# Altium PCB Motor Driver.PcbDoc
Units mm, origin at the board's own origin, x right, y up, seen from the top; angles counter-clockwise.
Board outline 59 x 58 mm, 2 copper layers (Top Layer, Bottom Layer); 19 components, 13 nets, 50 pads, 0 vias.
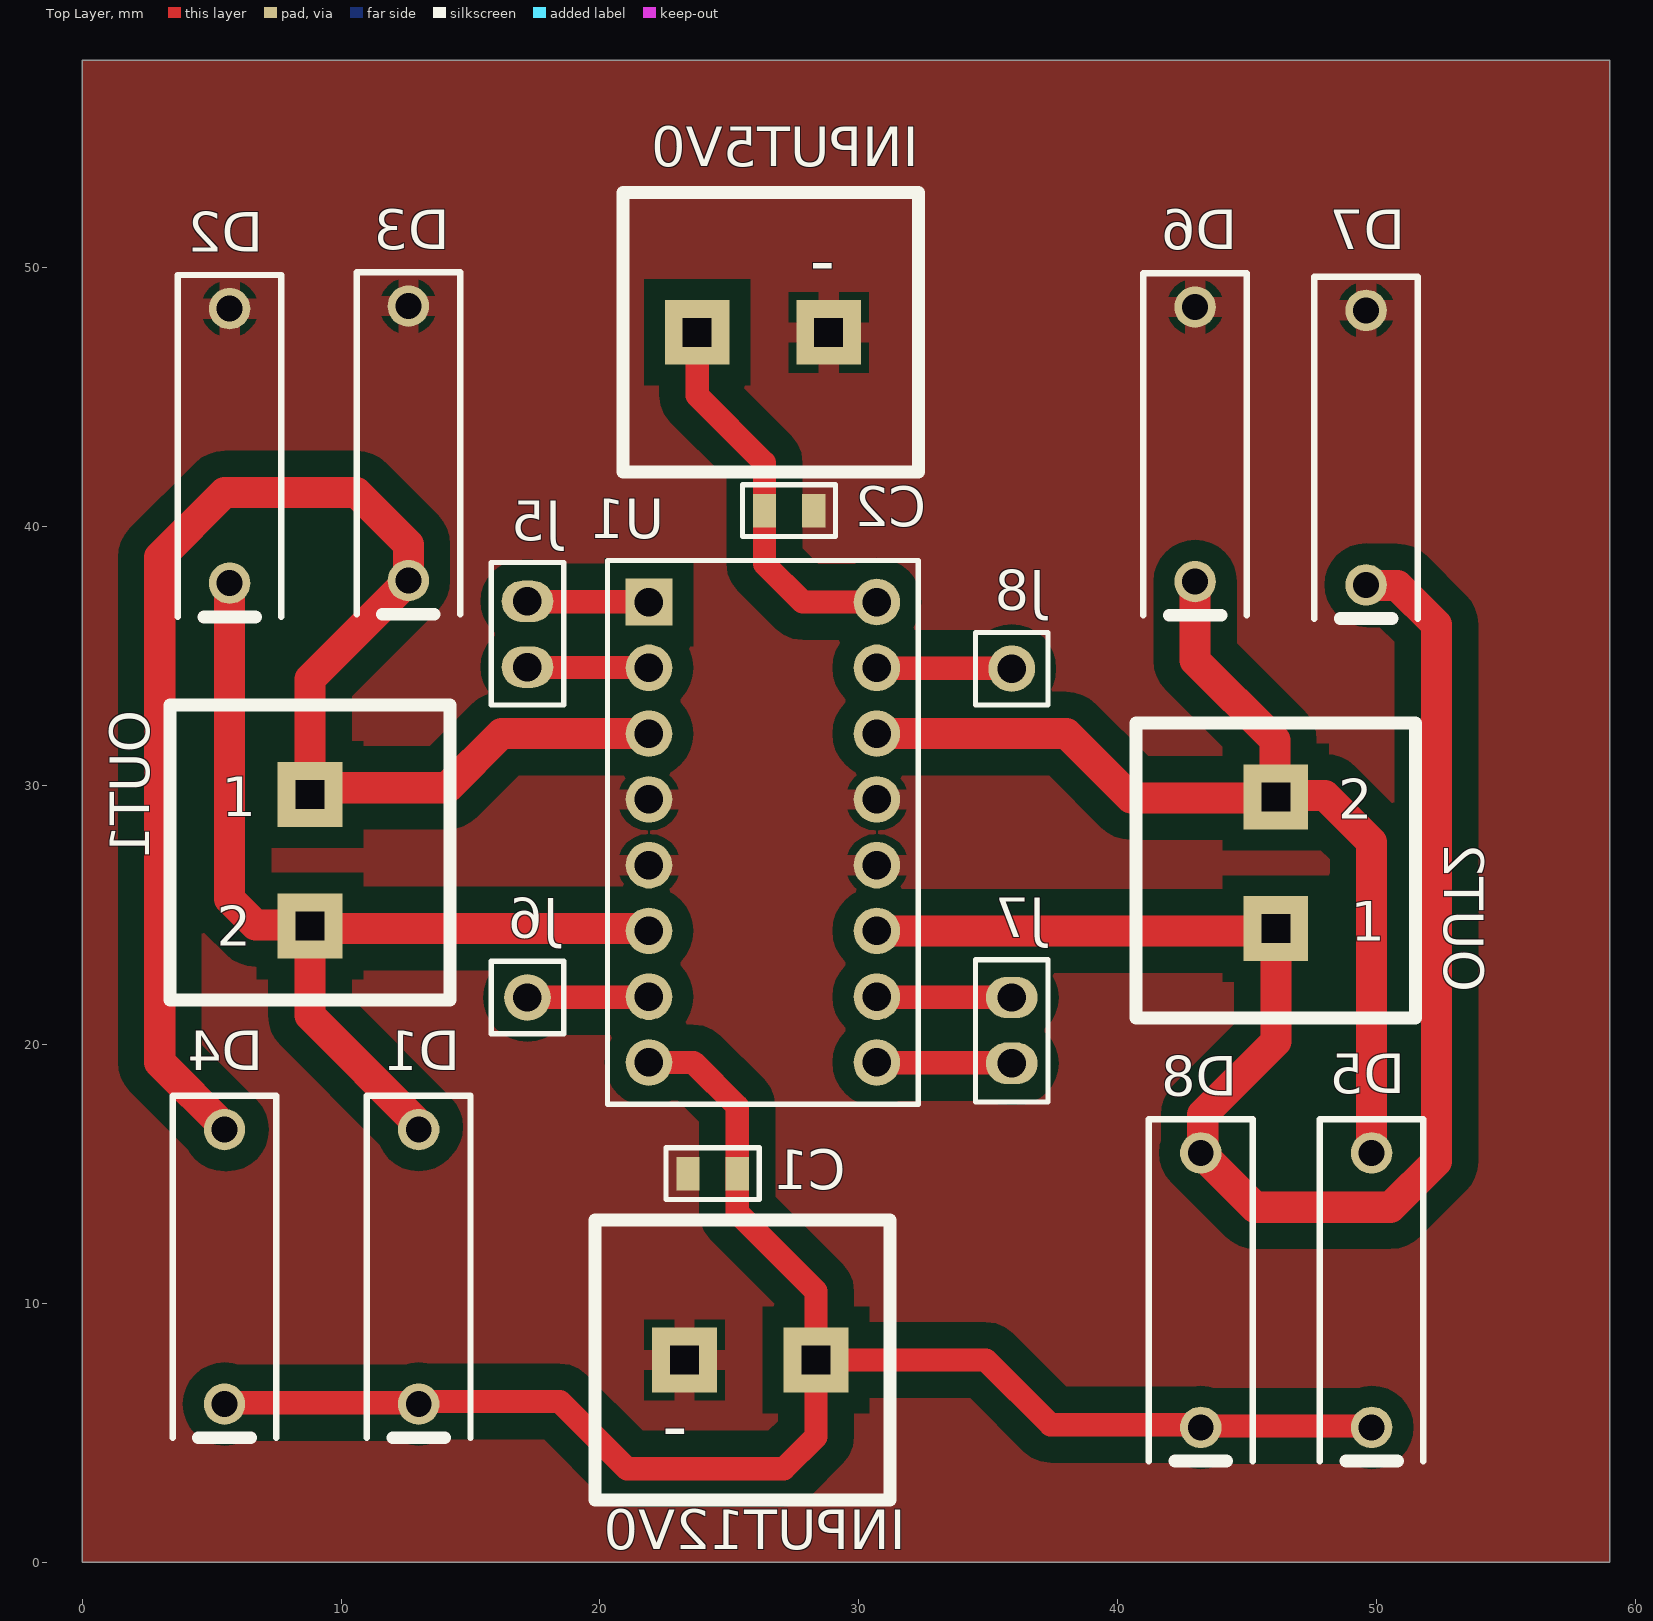
[diagram p0: Top Layer view]
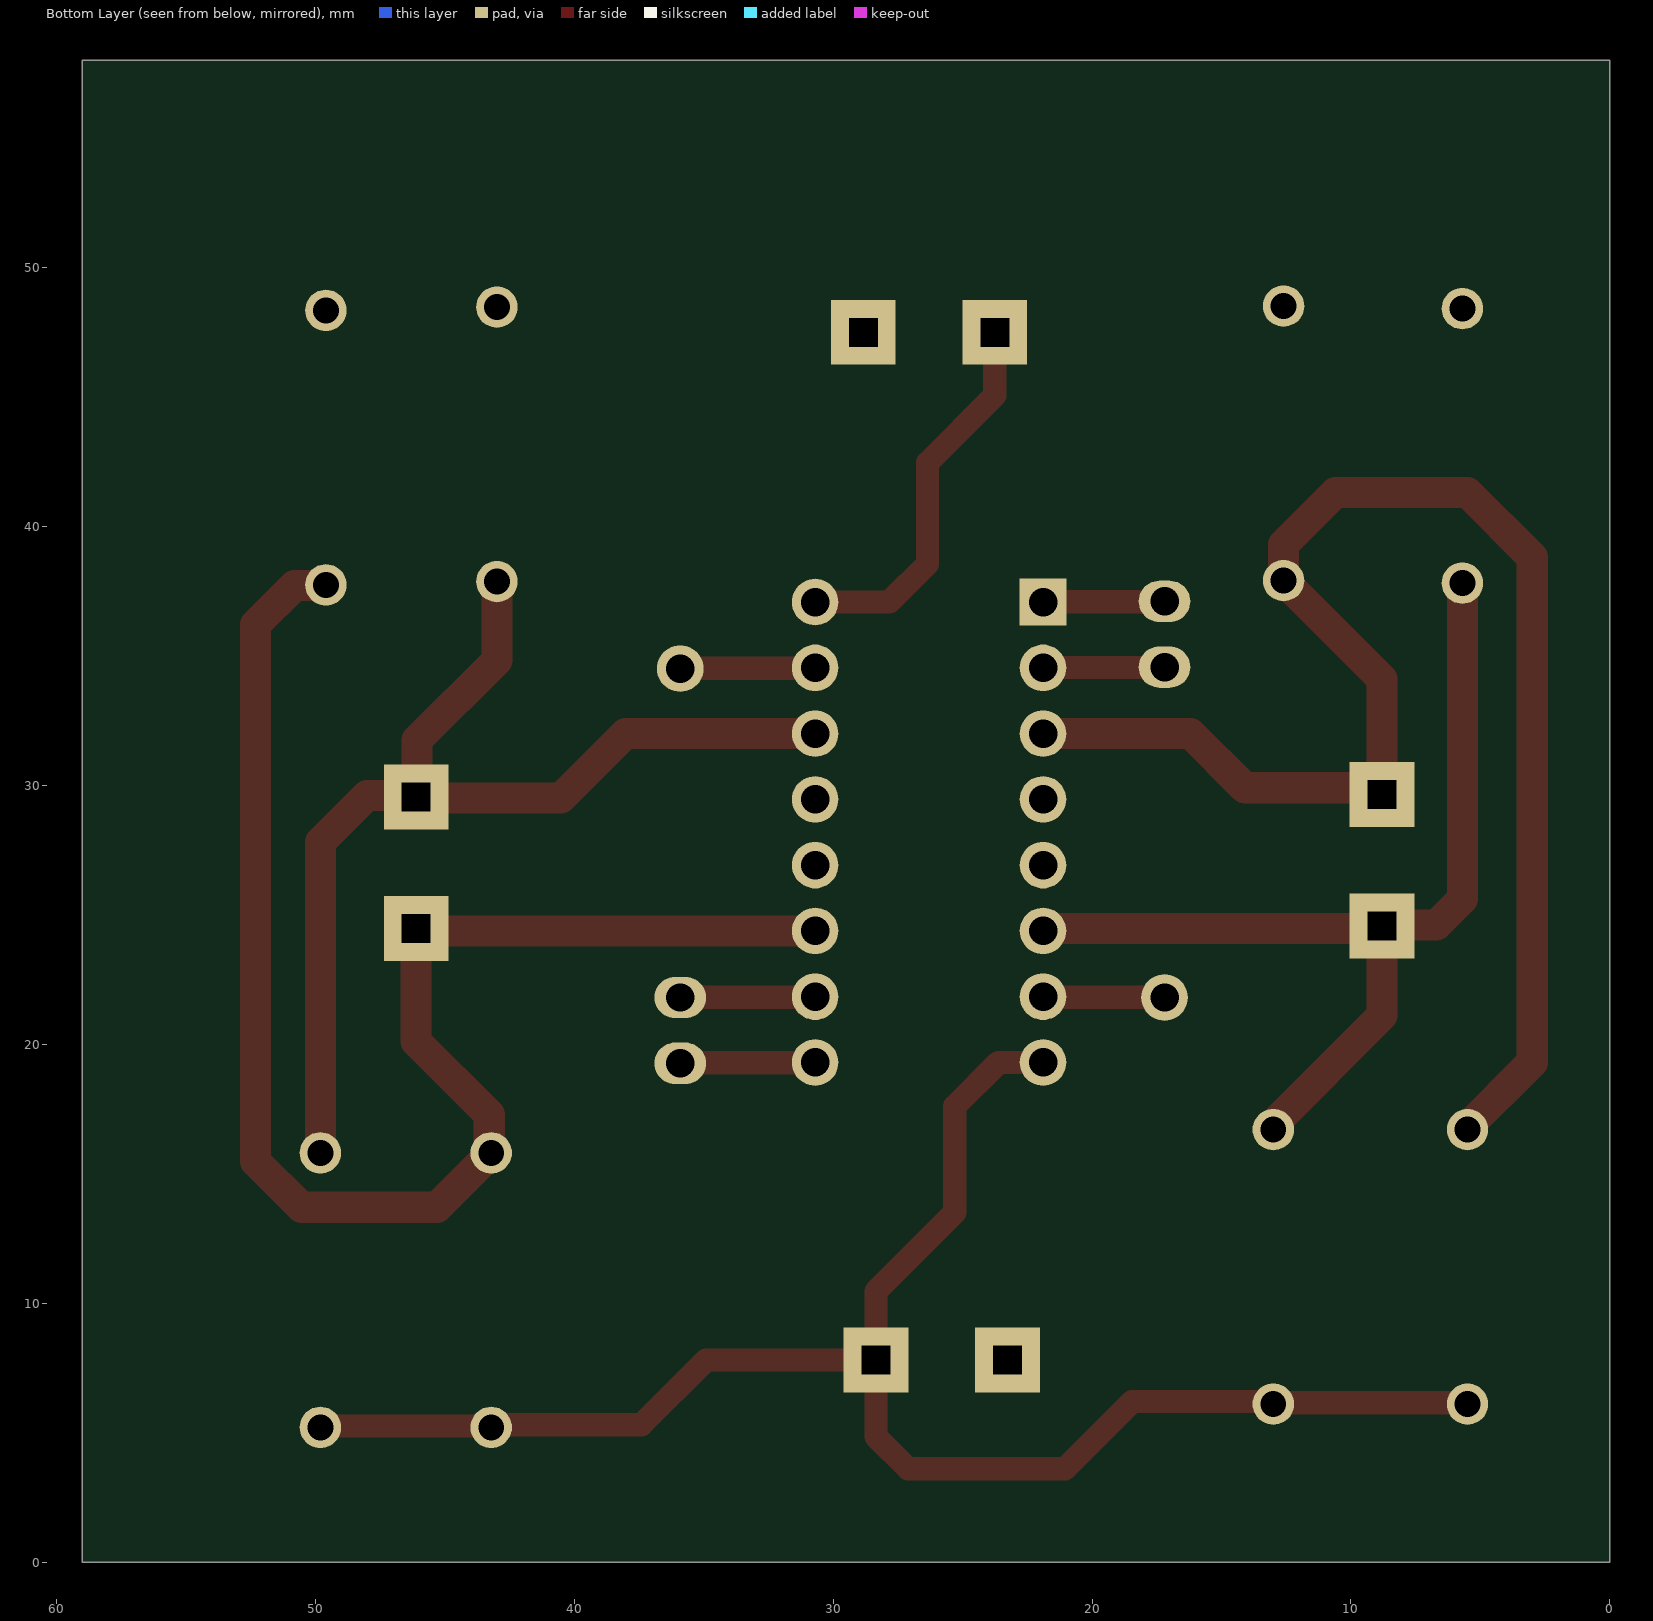
[diagram p1: Bottom Layer view, seen from below]
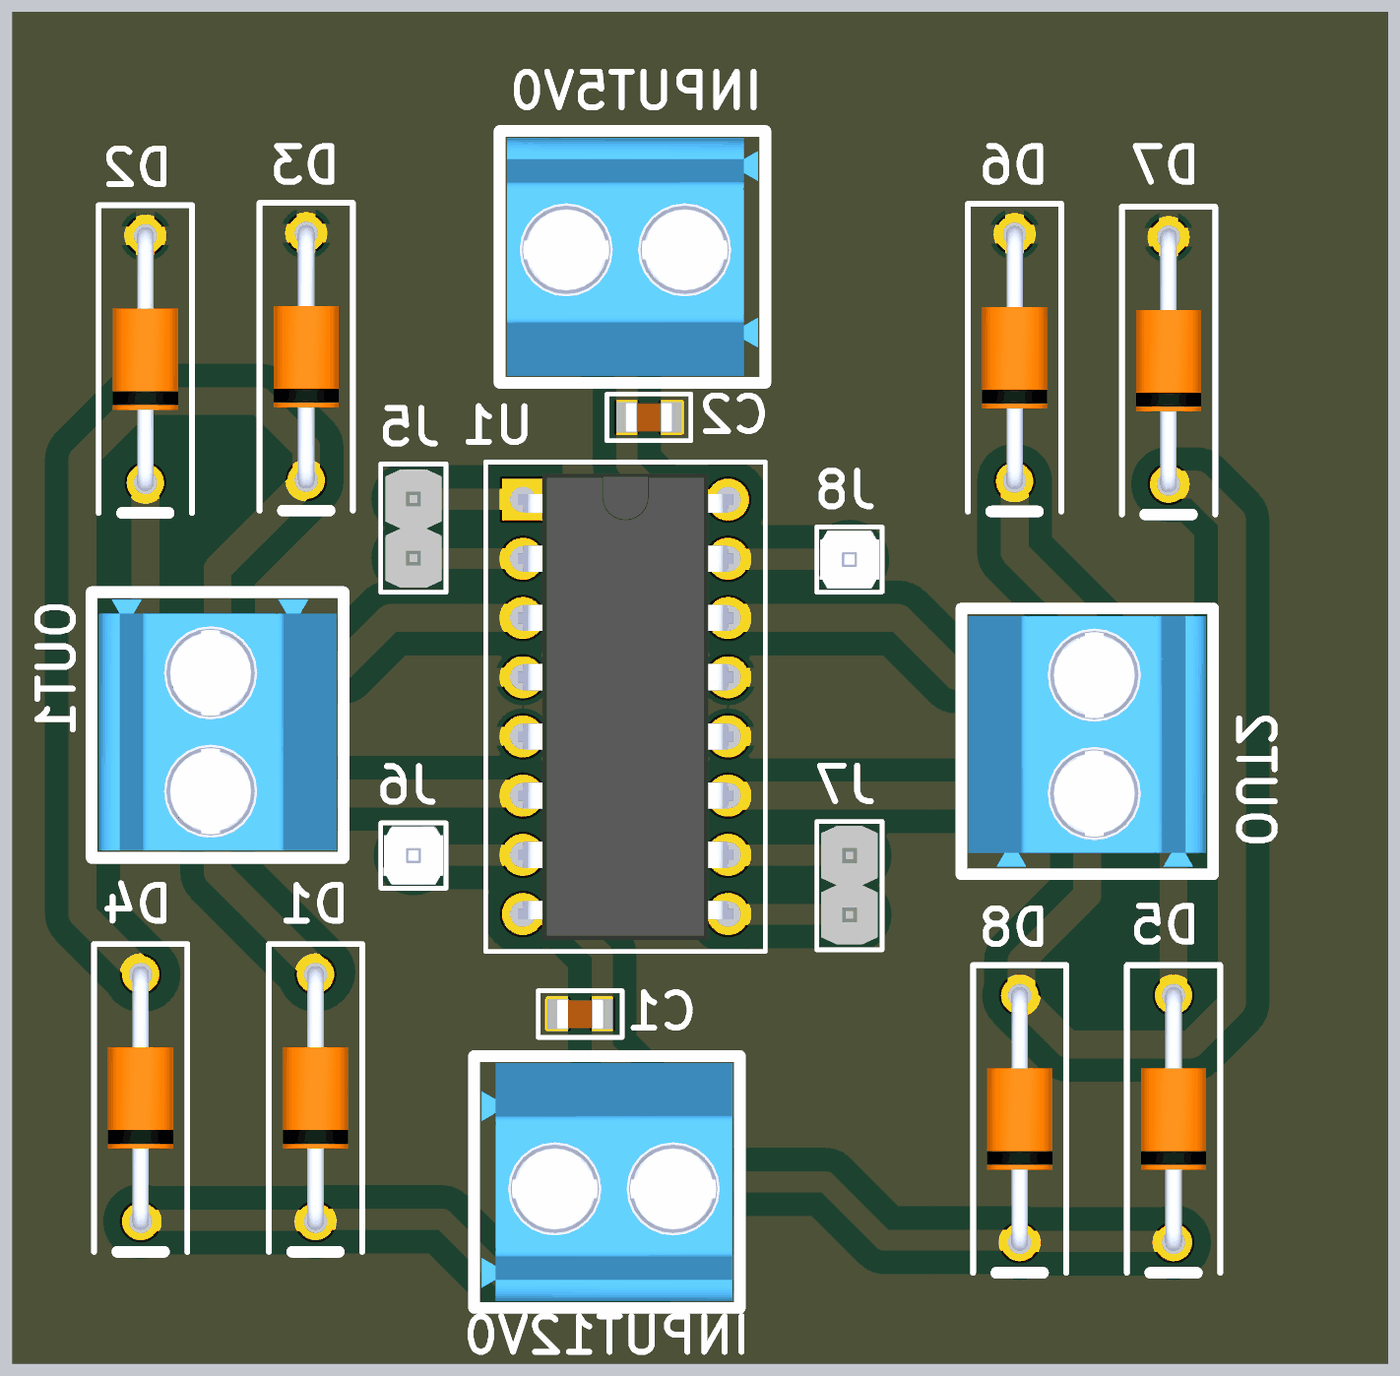
[diagram p2: 3D render of the assembled board from above, using the file's embedded part models]

## Layer stack, top to bottom
Top Solder: solder mask 0.0102, Solder Resist, Dk 3.5
Top Layer: signal copper 0.0356
Dielectric 1: dielectric 0.32, FR-4, Dk 4.8
Bottom Layer: signal copper 0.0356
Bottom Solder: solder mask 0.0102, Solder Resist, Dk 3.5

## Board outline
0,0 0,58 59,58 59,0

## Design rules (kind name [scope] priority, off if disabled: settings)
Clearance [All] p1: gap=0.6 ignorepadtopadclearanceinfootprint=FALSE except(0.8: SMDPad-Fill SMDPad-Poly SMDPad-Region THPad-Fill THPad-Poly THPad-Region Via-Fill Via-Poly Via-Region; 1: Arc-Fill Arc-Poly Arc-Region Track-Fill Track-Poly Track-Region Fill-Fill Fill-Poly Fill-Region Poly-Poly Poly-Region Region-Region)
PolygonConnect [All] p1: thpad.connectstyle=Relief thpad.reliefconductorwidth=0.8 thpad.reliefentries=4 thpad.polygonreliefangle="90 Angle" thpad.airgapwidth=0.3 smdpad.connectstyle=Direct smdpad.reliefconductorwidth=0.254 smdpad.reliefentries=4 smdpad.polygonreliefangle="90 Angle" smdpad.airgapwidth=0.254 via.connectstyle=Relief via.reliefconductorwidth=0.254 via.reliefentries=4 via.polygonreliefangle="90 Angle" via.airgapwidth=0.254
RoutingVias [All] p1: holewidth=0.711 width=1.27 viastyle="Through Hole" minholewidth=0.711 minwidth=1.27 maxholewidth=0.711 maxwidth=1.27
SilkToSilkClearance [All] p1: silktosilkclearance=0.1
SilkToSolderMaskClearance [IsPad] p1: minsilkscreentomaskgap=0.1 clearancetoexposedcopper=TRUE
SolderMaskExpansion [All] p1: expansion=0.102
Width [All] p1: maxlimit=2 minlimit=0.254 preferedwidth=0.8 toplayer_minwidth=0.6 bottomlayer_maxwidth=0.254 bottomlayer_prefwidth=0.254 minimp=50.000000 maximp=50.000000 favimp=50.000000
28 further rules are at their usual default settings.

## Components (designator, comment, footprint, x,y, rotation, side; value= is the part's Value field where it differs from the comment)
C1 "0.22uF" C0805 24.35,15 r0 top
C2 "0.1uF" C0805 27.3,40.6 r180 top
D1 "1N4007G" 1N4007 13,11.4 r90 top
D2 "1N4007G" 1N4007 5.7,43.1 r90 top
D3 "1N4007G" 1N4007 12.6,43.2 r90 top
D4 "1N4007G" 1N4007 5.5,11.4 r90 top
D5 "1N4007G" 1N4007 49.8,10.5 r90 top
D6 "1N4007G" 1N4007 42.983,43.162 r90 top
D7 "1N4007G" 1N4007 49.587,43.035 r90 top
D8 "1N4007G" 1N4007 43.2,10.5 r90 top
INPUT5V0 "102-6179-ND" "Terminal block" 26.292,47.485 r270 top (schematic designator J3)
INPUT12V0 "102-6179-ND" "Terminal block" 25.8,7.8 r90 top (schematic designator J1)
J5 "68000-202HLF" "HDR 1x2M" 17.2,37.1 r0 top
J6 "PH1-01-UA" "HDR 1x1M" 17.2,21.8 r180 top
J7 "68000-202HLF" "HDR 1x2M" 35.9,19.26 r180 top
J8 "PH1-01-UA" "HDR 1x1M" 35.9,34.5 r0 top
OUT1 "102-6179-ND" "Terminal block" 8.8,27.1 r0 top (schematic designator J2)
OUT2 "102-6179-ND" "Terminal block" 46.1,27 r180 top (schematic designator J4)
U1 "L293DNE" L293D 26.292,28.181 r0 top

## Footprints (in the part's own frame and the unit in brackets; to place one, negate y for a bottom-side part, rotate by r counter-clockwise, add the part's x,y. Pads: shape width x height; smd on the part's side, far side on the other; paste and mask are expansions set on the pad)
1N4007 [mm] "DIODE GEN PURP 1A DO204AL"
  round 1.6 hole 1: 1(-5.3,0) 2(5.3,0)
  silkscreen extent -6.6,-2 6.6,2, body extent -5.65,-1.4 5.65,1.4, height 2.8
C0805 [mm] "0.1uF"
  rect 0.9x1.3 smd: 1(-0.95,0) 2(0.95,0)
  silkscreen extent -1.8,-1 1.8,1, body extent -1,-0.62 1,0.63, height 1
"HDR 1x1M" [mm]
  round 1.8 hole 1.1: 1(0,0)
  silkscreen extent -1.4,-1.4 1.4,1.4, body extent -1.27,-1.25 1.28,1.25, height 7.25
"HDR 1x2M" [mm] "CONN HEADER VERT 2POS 2.54MM"
  oval 2x1.6 hole 1.1: 1(0,0) 2(0,-2.54)
  silkscreen extent -1.4,-4 1.4,1.5, body extent -1.21,-3.81 1.21,1.27, height 8.18
L293D [mm]
  rect 1.8x1.8 hole 1.1: 1(-4.4,8.89)
  round 1.8 hole 1.1: 2(-4.4,6.35) 3(-4.4,3.81) 4(-4.4,1.27) 5(-4.4,-1.27) 6(-4.4,-3.81) 7(-4.4,-6.35) 8(-4.4,-8.89) 9(4.4,-8.89) 10(4.4,-6.35) 11(4.4,-3.81) 12(4.4,-1.27) 13(4.4,1.27) 14(4.4,3.81) 15(4.4,6.35) 16(4.4,8.89)
  silkscreen extent -6,-10.5 6,10.5, body extent -4.62,-10 4.62,10, height 5.1
"Terminal block" [mm] "102-6179-ND"
  rect 2.5x2.5 hole 1.1 square: 1(0,-2.54) 2(0,2.54)
  silkscreen extent -5.4,-5.4 5.4,6, body extent -5.1,-5.08 5.1,5.68, height 14.1

## Part data
C1: library part "0.22uF CAP", "CAP CER 0.22UF 25V X7R 0805", Manufacturer=YAGEO, MPN=CC0805KRX7R8BB224, SPN=311-1432-1-ND, Supplier=DigiKey
C2: library part "0.1uF CAP", "CAP CER 0.1UF 50V X7R 0805", Manufacturer="TDK Corporation", MPN=C2012X7R1H104K085AA, SPN=445-7534-1-ND, Supplier=DigiKey
D1 D2 D3 D4 D5 D6 D7 D8: library part 1N4007, "DIODE GEN PURP 1A DO204AL", Manufacturer="Taiwan Semiconductor Corporation", MPN=1N4007G, SPN=1801-1N4007GCT-ND, Supplier=DigiKey
INPUT5V0 INPUT12V0 OUT1 OUT2: library part "Terminal block", "TERMINAL BLOCK, SCREW TYPE, 5.08", Manufacturer="CUI Devices", MPN=TB004-508-02BE, Parameter 1=102-6179-ND, Supplier=DigiKey
J5 J7: library part "HDR 1x2M", "CONN HEADER VERT 2POS 2.54MM", Manufacturer="Amphenol ICC (FCI)", MPN=68000-202HLF, SPN=609-3502-ND, Supplier=DigiKey
J6 J8: library part "HDR 1x1M", "CONN HEADER VERT 1POS 2.54MM", Manufacturer="Adam Tech", MPN=PH1-01-UA, SPN=2057-PH1-01-UA-ND, Supplier=DigiKey
U1: "IC MTR DRV BIPOLAR 4.5-36V 16DIP", Manufacturer="Texas Instruments", MPN=L293DNE, SPN=296-9518-5-ND, Supplier=DigiKey

## Nets (pads, with @x,y where several pads share a name; then routed paths per layer and width w, separated by ;. In a path a pad name is that pad's centre, name@x,y a point inside that pad or via, vN(x,y) a via of type N, cw(c..) or ccw(c..) an arc to the next point about the centre after c; other vN are vias at no path point)
+5V0: C2.2 INPUT5V0.1 U1.16 | length 15
  Top Layer w0.9: INPUT5V0.1 23.752,45.048 26.35,42.45 C2.2 26.35,38.55 27.829,37.071 U1.16
+12V0: C1.2 D1.1 D4.1 D5.1 D8.1 INPUT12V0.1 U1.8 | length 65
  Top Layer w0.9: D4.1@5.6,6.1 5.65,6.15 13.05,6.15 13.1,6.2 18.445,6.2 21.045,3.6 27.1,3.6 28.34,4.84 INPUT12V0.1 ; U1.8 23.609,19.291 25.3,17.6 25.3,13.5 28.34,10.46 INPUT12V0.1 ; D5.1 49.75,5.25 43.35,5.25 43.3,5.3 37.4,5.3 34.9,7.8 INPUT12V0.1
EN1: J5.1 U1.1 | length 4.7
  Top Layer w0.9: J5.1 17.215,37.085 21.878,37.085 U1.1 U1.1@21.887,37.065
EN2: J7.1 U1.9 | length 5.2
  Top Layer w0.9: U1.9 30.708,19.275 35.885,19.275 J7.1
GND: C1.1 C2.1 D2.2 D3.2 D6.2 D7.2 INPUT5V0.2 INPUT12V0.2 U1.4 U1.5 U1.12 U1.13
IN1.1: J5.2 U1.2 | length 4.7
  Top Layer w0.9: J5.2 17.215,34.545 21.878,34.545 U1.2 U1.2@21.887,34.525
IN1.2: J6.1 U1.7 | length 4.8
  Top Layer w0.9: J6.1 17.216,21.815 21.877,21.815 U1.7 U1.7@21.934,21.873
IN2.1: J7.2 U1.10 | length 5.2
  Top Layer w0.9: U1.10 30.708,21.815 35.885,21.815 J7.2
IN2.2: J8.1 U1.15 | length 5.5
  Top Layer w0.9: U1.15@30.52,34.359 U1.15 30.708,34.515 35.885,34.515 J8.1
O1: D3.1 D4.2 OUT1.2 U1.3 | length 59.4
  Top Layer w1.2: D4.2@5.6,16.7 3,19.3 3,38.8 5.5,41.3 10.6,41.3 12.6,39.3 D3.1 8.8,34.1 8.8,30.16 9.06,29.9 14.1,29.9 16.191,31.991 U1.3
O2: D1.2 D2.1 OUT1.1 U1.6 | length 38.4
  Top Layer w1.2: D2.1 5.7,25.6 6.7,24.6 8.76,24.6 OUT1.1 ; D1.2@13.1,16.8 8.8,21.1 OUT1.1 ; U1.6 21.798,24.465 8.895,24.465 OUT1.1
O3: D7.1 D8.2 OUT2.2 U1.11 | length 60
  Top Layer w1.2: U1.11 46.1,24.371 46.1,20.1 43.277,17.277 43.277,15.877 D8.2 45.3,13.7 50.528,13.7 52.3,15.472 52.3,36.2 50.787,37.713 49.609,37.713 D7.1
O4: D5.2 D6.1 OUT2.1 U1.14 | length 42.5
  Top Layer w1.2: U1.14 38.009,31.991 40.5,29.5 46.06,29.5 46.06,31.74 42.983,34.817 D6.1 ; OUT2.1@46.1,29.6 48,29.6 49.8,27.8 D5.2

## Polygon pours and split planes (outlines as drawn)
GND on Top Layer "GND" (solid, remove dead copper, pour order 0): 0,58 59,58 59,0 0,0

## Silkscreen, mask and mechanical layers (free items; w line width, h text height)
Top Overlay:
  text "-" at 28.1,49.3 h2
  text "1" at 5.4,28.8 h1.52
  text "2" at 48.5,28.7 h1.52
  text "1" at 49,24 h1.52
  text "2" at 5.2,23.8 h1.52
  text "-" at 22.4,4.3 h2